# Altium PCB PCB_32u4最小系统-copy_2025-07-01.pcbdoc
Units mil, origin at the board's own origin, x right, y up, seen from the top; angles counter-clockwise.
Board outline 4150.55 x 3100 mil, 2 copper layers (Top Layer, Bottom Layer); 33 components, 40 nets, 158 pads, 52 vias.
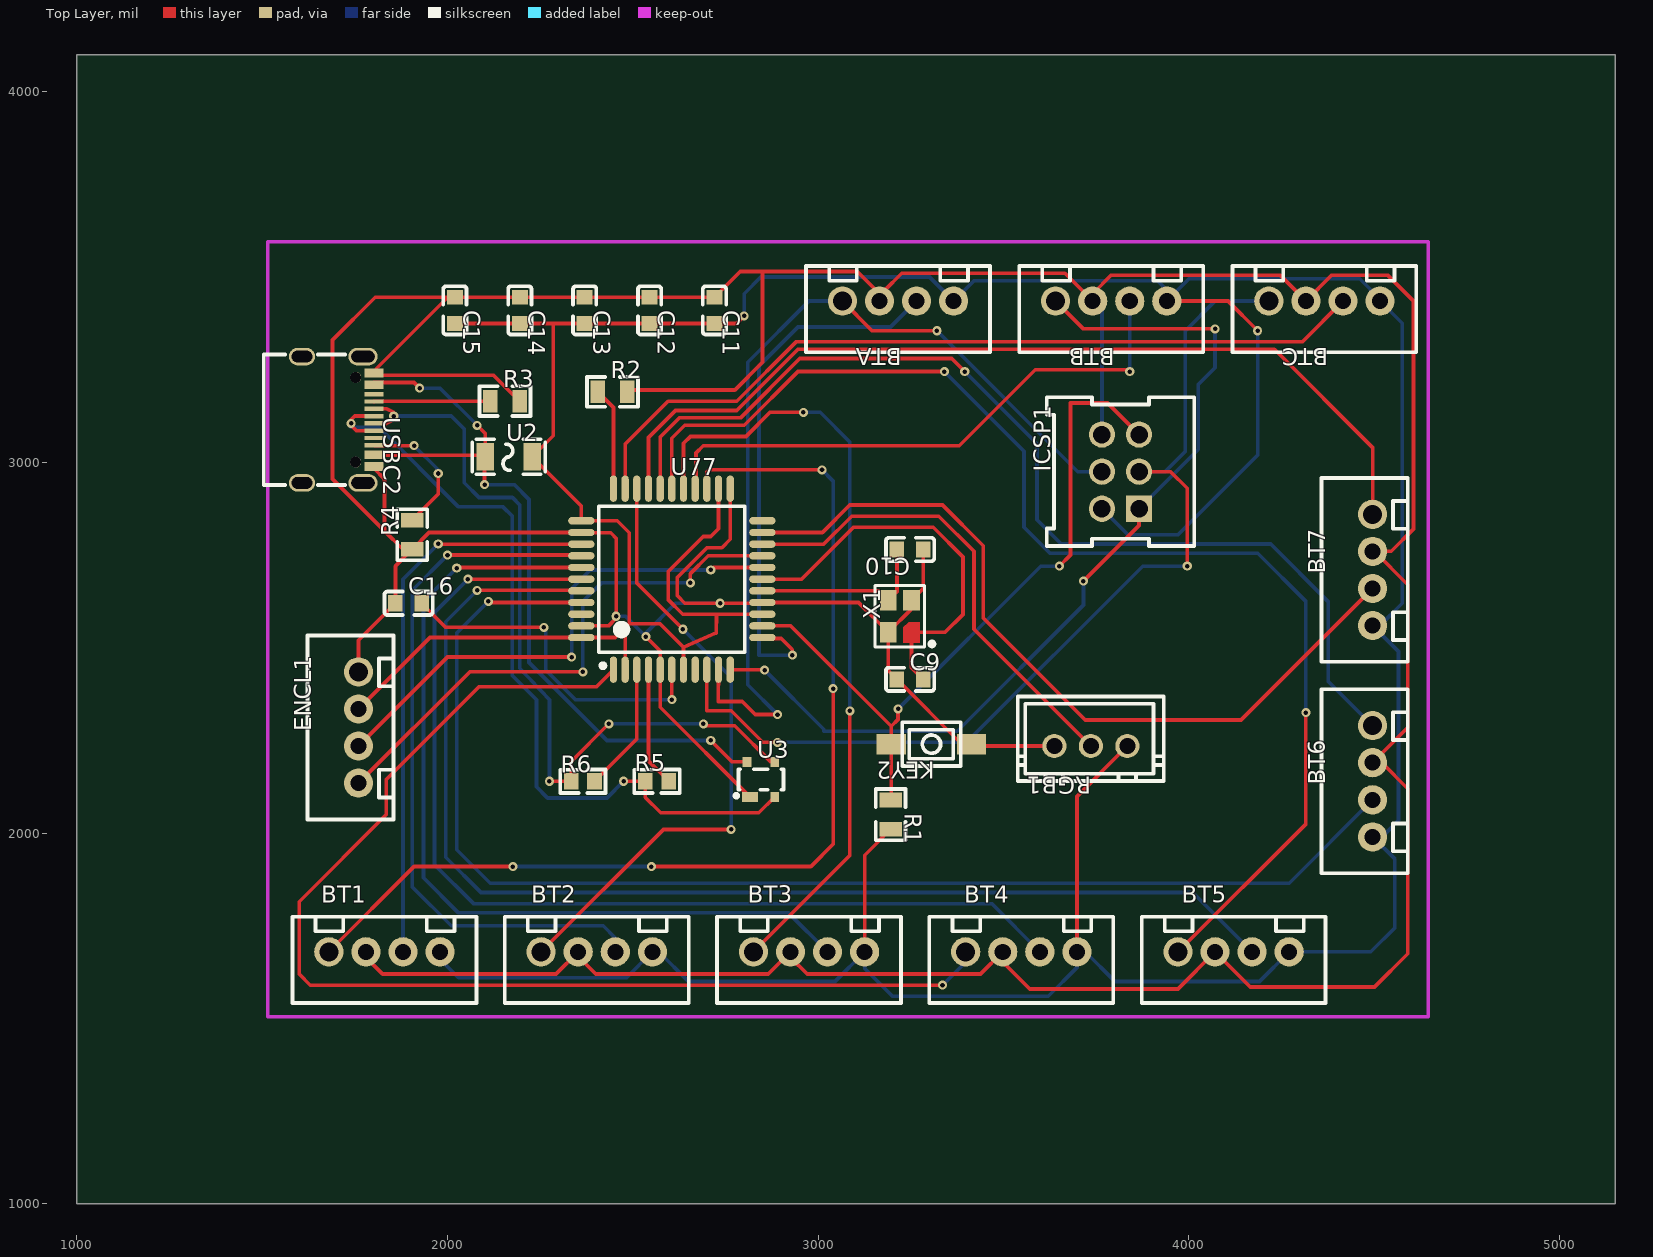
[diagram p0: Top Layer view]
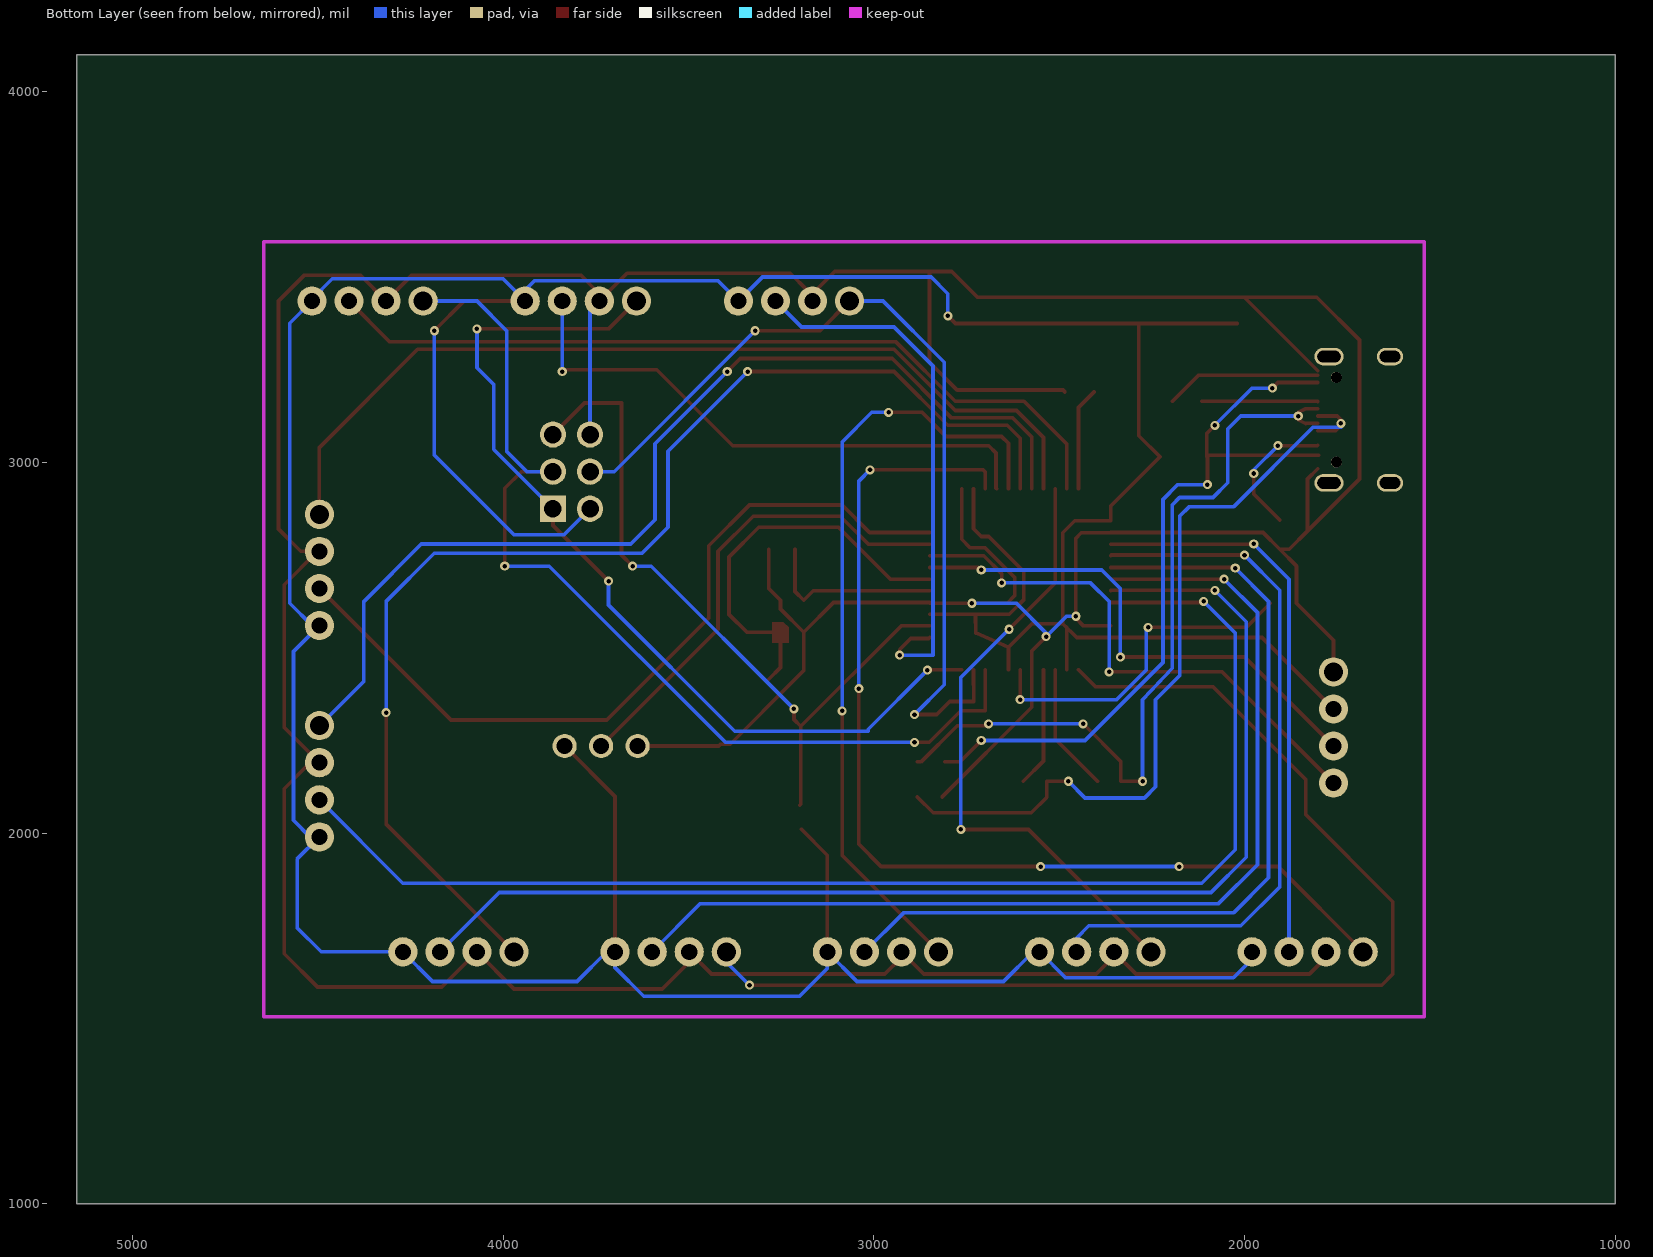
[diagram p1: Bottom Layer view, seen from below]

## Layer stack, top to bottom
Top Layer: signal copper (thickness not stored)
Dielectric: dielectric 12.6, FR-4, Dk 4.8
Bottom Layer: signal copper (thickness not stored)

## Board outline
5150.55,1000 1000,1000 1000,4100 5150.55,4100

## Components (designator, comment, footprint, x,y, rotation, side; value= is the part's Value field where it differs from the comment)
BT1 "XH2.54-4" CONN-TH_XH2.54-4 1830.55,1680 r180 top
BT2 "XH2.54-4" CONN-TH_XH2.54-4 2403.05,1680 r180 top
BT3 "XH2.54-4" CONN-TH_XH2.54-4 2975.55,1680 r180 top
BT4 "XH2.54-4" CONN-TH_XH2.54-4 3548.05,1680 r180 top
BT5 "XH2.54-4" CONN-TH_XH2.54-4 4120.55,1680 r180 top
BT6 "XH2.54-4" CONN-TH_XH2.54-4 4495.55,2140 r90 top
BT7 "XH2.54-4" CONN-TH_XH2.54-4 4495.55,2710 r90 top
BTA "XH2.54-4" CONN-TH_XH2.54-4 3215.55,3435 r180 top
BTB "XH2.54-4" CONN-TH_XH2.54-4 3790.55,3435 r180 top
BTC "XH2.54-4" CONN-TH_XH2.54-4 4365.55,3435 r180 top
C9 "22pF" C0603 3248.1,2415 r0 top
C10 "22pF" C0603 3248.1,2765 r180 top
C11 "100nF" C0603 2720.55,3410 r270 top
C12 "100nF" C0603 2545.55,3410 r270 top
C13 "100nF" C0603 2370.55,3410 r270 top
C14 "100nF" C0603 2195.55,3410 r270 top
C15 "470nF" C0603 2020.55,3410 r270 top
C16 "1uF" C0603 1895.55,2620 r0 top
ENCL1 "XH2.54-4" CONN-TH_XH2.54-4 1760.55,2285 r90 top
ICSP1 "XH2_54-2X3P直插" CONN-TH_XH2.54-2X3P 3815.55,2975 r90 top
KEY2 "Switch3x4x2" KEY-3.0*4.0 3305.55,2240 r180 top
R1 "10K" R0805 3195.55,2050 r270 top
R2 "1K" R0805 2445.55,3190 r0 top
R3 "5.1K" R0805 2155.55,3165 r0 top
R4 "5.1K" R0805 1905.55,2805 r90 top
R5 "22" R0603 2565.55,2140 r180 top
R6 "22" R0603 2365.55,2140 r180 top
RGB1 "XH2.54-3P 直插" CONN-TH_XH2.54-3P 3735.55,2235 r180 top
U2 "MF-NSMF050-2" F1206 2165.55,3015 r0 top
U3 "PRTR5V0U2X" SOT-143_L2.9-W1.3-P1.92-LS2.3-BL 2845.55,2145 r0 top
U77 "ATMEGA32U4-AU" QFP-44_L10.0-W10.0-P0.80-LS13.2-BL 2605.55,2685 r0 top
USBC2 "TYPE-C-31-M-12" USB-C_SMD-TYPE-C-31-M-12 1705.55,3115 r270 top
X1 "16MHz" OSC-SMD_4P-L3.2-W2.5-BL 3220.55,2585 r90 top

## Footprints (in the part's own frame and the unit in brackets; to place one, negate y for a bottom-side part, rotate by r counter-clockwise, add the part's x,y. Pads: shape width x height; smd on the part's side, far side on the other; paste and mask are expansions set on the pad)
C0603 [mm]
  rect 1x1.1 smd paste+0 mask+0.102: 1(-0.9,0) 2(0.9,0)
  silkscreen extent -1.65,-0.8 1.65,0.8
CONN-TH_XH2.54-2X3P [mm]
  rect 1.8x1.8 hole 1.2 paste+0 mask+0.05: 1(-2.54,-1.27)
  round 1.8 hole 1.2 paste+0 mask+0.05: 2(0,-1.27) 3(2.54,-1.27) 4(2.54,1.27) 5(0,1.27) 6(-2.54,1.27)
  silkscreen extent -5.1,-5.05 5.1,5.05
CONN-TH_XH2.54-3P [mm]
  round 1.65 hole 1.1 paste+0 mask+0.05: 1(-2.5,0) 2(0,0) 3(2.5,0)
  silkscreen extent -5,-3.4 5,2.4
CONN-TH_XH2.54-4 [mm]
  round 2 hole 1.1 paste+0 mask+0.051: 1(-3.81,0) 2(-1.27,0) 3(1.27,0)
  round 2 hole 1.3 paste+0 mask+0.051: 4(3.81,0)
  silkscreen extent -6.3,-2.4 6.3,3.5
F1206 [mm]
  rect 1.2x1.9 smd paste+0 mask+0.102: 1(-1.6,0) 2(1.6,0)
  silkscreen extent -2.5,-1.2 2.5,1.2
KEY-3.0*4.0 [mm]
  rect 2x1.4 smd paste+0 mask+0.051: 1(-2.752,0.001) 2(2.752,-0.001)
  silkscreen extent -2.01,-1.5 1.99,1.5
OSC-SMD_4P-L3.2-W2.5-BL [mm]
  rect 1.4x1.15 smd paste+0 mask+0.102: 2(1.1,-0.8) 3(1.1,0.8) 4(-1.1,0.8)
  Top Layer region: -1.8,-0.225 -0.762,-0.225 -0.4,-0.604 -0.4,-1.375 -1.8,-1.375
  silkscreen extent -2.1,-2.35 2.1,1.7
QFP-44_L10.0-W10.0-P0.80-LS13.2-BL [mm]
  oval 0.5x1.8 smd paste+0 mask+0.102: 1(-4,-6.2) 2(-3.2,-6.2) 3(-2.4,-6.2) 4(-1.6,-6.2) 5(-0.8,-6.2) 6(0,-6.2) 7(0.8,-6.2) 8(1.6,-6.2) 9(2.4,-6.2) 10(3.2,-6.2) 11(4,-6.2) 23(4,6.2) 24(3.2,6.2) 25(2.4,6.2) 26(1.6,6.2) 27(0.8,6.2) 28(0,6.2) 29(-0.8,6.2) 30(-1.6,6.2) 31(-2.4,6.2) 32(-3.2,6.2) 33(-4,6.2)
  oval 1.8x0.5 smd paste+0 mask+0.102: 12(6.2,-4) 13(6.2,-3.2) 14(6.2,-2.4) 15(6.2,-1.6) 16(6.2,-0.8) 17(6.2,0) 18(6.2,0.8) 19(6.2,1.6) 20(6.2,2.4) 21(6.2,3.2) 22(6.2,4) 34(-6.2,4) 35(-6.2,3.2) 36(-6.2,2.4) 37(-6.2,1.6) 38(-6.2,0.8) 39(-6.2,0) 40(-6.2,-0.8) 41(-6.2,-1.6) 42(-6.2,-2.4) 43(-6.2,-3.2) 44(-6.2,-4)
  silkscreen extent -5,-6.08 5,5
R0603 [mm]
  rect 1x1.1 smd paste+0 mask+0.102: 1(-0.8,0) 2(0.8,0)
  silkscreen extent -1.55,-0.8 1.55,0.81
R0805 [mm]
  rect 1x1.55 smd paste+0 mask+0.102: 1(-1,0) 2(1,0)
  silkscreen extent -1.75,-1.02 1.75,1.02
SOT-143_L2.9-W1.3-P1.92-LS2.3-BL [mm]
  rect 1.1x0.7 smd paste+0 mask+0.05: 1(-0.75,-1.2)
  rect 0.6x0.7 smd paste+0 mask+0.05: 2(0.95,-1.2) 3(0.95,1.2) 4(-0.95,1.2)
  silkscreen extent -1.8,-1.24 1.55,0.7
USB-C_SMD-TYPE-C-31-M-12 [mm]
  oval 1.2x2 hole 0.8 slot 1.6 at 90 deg paste+0 mask+0.051: 0(-4.325,1.706) 1(4.325,1.706)
  oval 1.2x1.8 hole 0.8 slot 1.4 at 90 deg paste+0 mask+0.051: 2(4.325,-2.474) 3(-4.325,-2.474)
  rect 0.3x1.3 smd paste-100 mask+0.051: A1(-3.35,2.474) A4(-2.55,2.474) A5(-1.25,2.474) A6(-0.25,2.474) A7(0.25,2.474) A8(1.25,2.474) A9(2.55,2.474) A12(3.35,2.474) B1(3.05,2.474) B4(2.25,2.474) B5(1.75,2.474) B6(0.75,2.474) B7(-0.75,2.474) B8(-1.75,2.474) B9(-2.25,2.474) B12(-3.05,2.474)
  round 0.75 hole 0.75 unplated paste+0: ""(-2.9,1.206) ""(2.9,1.206)
  silkscreen extent -4.47,-5.09 4.47,0.49

## Via types
v1: diameter 24.41, hole 12.2, Top Layer to Bottom Layer, tented both sides, 52 vias

## Nets (pads, with @x,y where several pads share a name; then routed paths per layer and width w, separated by ;. In a path a pad name is that pad's centre, name@x,y a point inside that pad or via, vN(x,y) a via of type N, cw(c..) or ccw(c..) an arc to the next point about the centre after c; other vN are vias at no path point)
+5V: BT1.1 BT2.1 BT3.1 BT4.1 BT5.1 BT6.1 BT7.1 BTA.1 BTB.1 BTC.1 C11.2 C12.2 C13.2 C14.2 C15.2 ENCL1.3 ICSP1.6 R1.2 RGB1.1 U2.2 U77.2 U77.7 U77.14 U77.24 U77.34 U77.44 | length 12714.3
  Top Layer w10: ENCL1.3 1953.07,2527.52 U77.44 2453.05,2527.5 2490.55,2565 ; C15.2 C14.2 C13.2 C12.2 C11.2 2780.11,3374.56 v1(2800.55,3395) ; C13.2 2285.55,3374.6 2285.55,3072 2228.55,3015 2361.46,2882.09 U77.34 2458.05,2842.5 2490.55,2810 2490.55,2565 ; U77.2 2479.57,2554.02 2490.55,2565 ; U77.7 2637.05,2501.5 ; U77.24@2731.55,2929.1 2731.55,2821 2710.55,2800 2690.55,2800 2595.55,2705 2595.55,2630 2635.05,2590.5 2726.05,2590.5 ; U77.14@2849.65,2590.5 2726.05,2590.5 ; BT3.1 3125.55,1940.63 R1.2 ; BT4.1 3698.05,2099.07 RGB1.1 ; BTB.1 4105.55,3435 v1(4185.55,3355) ; 2490.55,2565 2573.55,2565 2637.05,2501.5 ; 2637.05,2501.5 2725.55,2540 2726.05,2590.5
  Bottom Layer w10: BT1.1 1980.55,1660 2030.55,1610 2483.05,1610 BT2.1 2570.55,1680 2650.55,1600 3045.55,1600 BT3.1 3125.55,1635 3200.55,1560 3620.55,1560 3698.05,1637.5 BT4.1 3720.55,1680 3800.55,1600 4190.55,1600 BT5.1 4490.55,1680 4555.55,1745 4555.55,1930 BT6.1 4520.55,1990 4565.55,2035 4565.55,2490 BT7.1 4515.55,2560 4575.55,2620 4575.55,3375 BTC.1 4515.55,3440 4460.55,3495 4000.55,3495 BTB.1 3940.55,3465 3915.55,3490 3420.55,3490 BTA.1 3300.55,3500 2845.55,3500 2800.55,3455 v1(2800.55,3395) ; ICSP1.6 3835.55,2805 3970.55,2805 4185.55,3020 v1(4185.55,3355)
A0: BT1.2 U77.36 | length 1525.5
  Top Layer w10: v1(1975.55,2780) 1976.06,2779.49 U77.36
  Bottom Layer w10: BT1.2 1880.55,2685 v1(1975.55,2780)
A1: BT2.2 U77.37 | length 1938
  Top Layer w10: v1(2000.55,2750) 2359.45,2750 U77.37
  Bottom Layer w10: v1(2000.55,2750) 1905.55,2655 1905.55,1855 2010.55,1750 2420.55,1750 2453.05,1717.5 BT2.2
A2: BT3.2 U77.38 | length 2381.7
  Top Layer w10: v1(2025.55,2715) 2027.05,2716.5 U77.38
  Bottom Layer w10: v1(2025.55,2715) 1935.55,2625 1935.55,1880 2030.55,1785 2920.55,1785 BT3.2
A3: BT4.2 U77.39 | length 2843
  Top Layer w10: v1(2055.55,2685) U77.39
  Bottom Layer w10: v1(2055.55,2685) 1965.55,2595 1965.55,1915 2070.55,1810 3468.05,1810 BT4.2
A4: BT5.2 U77.40 | length 3318.2
  Top Layer w10: v1(2080.55,2655) 2361.46,2655 U77.40
  Bottom Layer w10: v1(2080.55,2655) 1995.55,2570 1995.55,1935 2090.55,1840 4010.55,1840 BT5.2
A5: BT6.2 U77.41 | length 3557.8
  Top Layer w10: v1(2110.55,2625) 2113.54,2622.01 U77.41
  Bottom Layer w10: v1(2110.55,2625) 2025.55,2540 2025.55,1955 2115.55,1865 4270.55,1865 BT6.2
C16_2: C16.2 U77.6 | length 930.5
  Top Layer w10: C16.2 1995.99,2555 v1(2260.55,2555) ; v1(2605.55,2360) U77.6
  Bottom Layer w10: v1(2260.55,2555) 2265.55,2555 2265.55,2440 2345.55,2360 v1(2605.55,2360)
D0/RX: RGB1.2 U77.20 | length 1297
  Top Layer w10: U77.20@2849.65,2779.5 3015.05,2779.5 3090.55,2855 3325.55,2855 3420.55,2760 3420.55,2550 RGB1.2
D1/TX: BT7.2 U77.21 | length 2178.1
  Top Layer w10: U77.21@2849.65,2811 3011.55,2811 3085.55,2885 3335.55,2885 3445.55,2775 3445.55,2580 3720.55,2305 4140.55,2305 BT7.2
D2/SDA: ENCL1.1 U77.19 | length 1469
  Top Layer w10: ENCL1.1 2060.55,2435 v1(2365.55,2435) ; v1(2655.55,2675) 2655.55,2700 2703.55,2748 U77.19@2849.66,2748
  Bottom Layer w10: v1(2365.55,2435) 2365.55,2625 2415.55,2675 v1(2655.55,2675)
D3/SCL: ENCL1.2 U77.18 | length 1396.9
  Top Layer w10: ENCL1.2 2000.55,2475 v1(2335.55,2475) ; v1(2710.55,2710) 2717.05,2716.5 U77.18
  Bottom Layer w10: v1(2335.55,2475) 2335.55,2660 2385.55,2710 v1(2710.55,2710)
D4: BT1.4 U77.25 | length 2860.7
  Top Layer w10: BT1.4 1910.55,1910 v1(2176.68,1910) ; v1(2550.55,1910) 2980.55,1910 3040.55,1970 v1(3040.55,2389.86) ; U77.25@2700.05,2929.1 2700.05,2974.5 2705.55,2980 v1(3010.55,2980)
  Bottom Layer w10: v1(2176.68,1910) v1(2550.55,1910) ; v1(3010.55,2980) 3040.55,2950 v1(3040.55,2389.86)
D5*: BT2.4 U77.31 | length 1673.7
  Top Layer w10: BT2.4 2583.05,2010 v1(2765.55,2010) ; U77.31 2511.06,2674.49 v1(2635.55,2550)
  Bottom Layer w10: v1(2635.55,2550) 2765.55,2420 v1(2765.55,2010)
D6*: BT3.4 U77.27 | length 2121.3
  Top Layer w10: U77.27 2637.05,3051.5 2655.55,3070 2805.55,3070 2870.55,3135 v1(2960.55,3135) ; BT3.4 3085.55,1940 v1(3085.55,2330)
  Bottom Layer w10: v1(2960.55,3135) 3005.55,3135 3085.55,3055 v1(3085.55,2330)
D7: BT4.4 U77.1 | length 3220.7
  Top Layer w10: U77.1 2402.16,2395 2085.55,2395 1835.55,2145 1835.55,2050 1600.55,1815 1600.55,1620 1630.55,1590 v1(3335.55,1590)
  Bottom Layer w10: v1(3335.55,1590) 3398.05,1652.5 BT4.4
D+: R5.1 U77.4 | length 323.5
  Top Layer w10: U77.4 2542.56,2194.48 R5.1
D-: R6.1 U77.3 | length 348.1
  Top Layer w10: R6.1 2511.06,2254.02 U77.3
GND: BT1.3 BT2.3 BT3.3 BT4.3 BT5.3 BT6.3 BT7.3 BTA.3 BTB.3 BTC.3 C9.1 C10.1 C11.1 C12.1 C13.1 C14.1 C15.1 C16.1 ENCL1.4 ICSP1.4 KEY2.1 R2.2 R3.2 R4.1 RGB1.3 U3.1 U77.5 U77.15 U77.23 U77.35 U77.43 USBC2.A1 USBC2.A12 USBC2.B1 USBC2.B12 X1.2 X1.4 | length 14972.8
  Top Layer w10: ENCL1.4 1760.55,2520.43 C16.1 1860.12,2720.2 R4.1 ; BT1.3 1780.55,1665 1825.55,1620 2293.05,1620 BT2.3 2353.05,1667.5 2400.55,1620 2865.55,1620 BT3.3 2925.55,1665 2970.55,1620 3438.05,1620 BT4.3 3498.05,1652.5 3570.55,1580 3970.55,1580 BT5.3 4165.55,1585 4500.55,1585 4590.55,1675 4590.55,2120 4520.55,2190 BT6.3 4590.55,2285 4590.55,2670 4500.55,2760 BT7.3 4545.55,2760 4605.55,2820 4605.55,3435 4535.55,3505 4385.55,3505 BTC.3 4245.55,3505 3790.55,3505 3740.55,3455 BTB.3 3665.55,3510 3225.55,3510 BTA.3@3179.15,3463.6 ; USBC2.A12 1830.55,2955.52 1830.55,2815 ; USBC2.B12 2124.84,3235.08 R3.2 ; USBC2.A1 2001.51,3445.43 C15.1 ; U77.43 2434.55,2559 2455.55,2580 v1(2455.55,2585) 2455.55,2795 2440.55,2810 U77.35 1950.9,2810.98 R4.1 ; R2.2@2484.95,3190 2489.95,3195 2775.55,3195 2849.95,3270 2849.95,3515 ; v1(2535.55,2530) 2574.05,2491.5 U77.5 2574.05,2339.73 U3.1 ; U77.23@2763.05,2929.1 2763.05,2792.5 2740.55,2770 2700.55,2770 2620.55,2690 2620.55,2640 2640.55,2620 v1(2735.55,2620) 2849.65,2620 2849.65,2622 3108.73,2622.01 X1.4 ; BTA.3 3165.55,3455 3105.55,3515 2790.12,3515 C11.1 C12.1 C13.1 C14.1 C15.1 ; C10.1 3283.53,2659.79 X1.2 3252.05,2604.69 X1.4 ; RGB1.3 3418.85,2235 KEY2.1 3387.71,2239.96 C9.1 3189.05,2438.62 X1.4 ; 1830.55,2815 1879.92,2765.63 R4.1 ; 1830.55,2815 1690.55,2955 1690.55,3330 1805.98,3445.43 C15.1
  Bottom Layer w10: v1(2455.55,2585) 2480.55,2585 v1(2535.55,2530) 2535.55,2540 2615.55,2620 v1(2735.55,2620) ; BTB.3 3765.55,3410 ICSP1.4
IO8: BT5.4 U77.28 | length 3385.3
  Top Layer w10: U77.28 2605.55,3065 2640.55,3100 2800.55,3100 2945.55,3245 v1(3340.55,3245) ; BT5.4 4315.55,2025 v1(4315.55,2325)
  Bottom Layer w10: v1(3340.55,3245) 3555.55,3030 3555.55,2825 3625.55,2755 4185.55,2755 4315.55,2625 v1(4315.55,2325)
IO9*: BT6.4 U77.29 | length 2804.6
  Top Layer w10: U77.29 2574.05,3068.5 2625.55,3120 2790.55,3120 2950.55,3280 3360.55,3280 v1(3395.55,3245)
  Bottom Layer w10: v1(3395.55,3245) 3590.55,3050 3590.55,2845 3655.55,2780 4220.55,2780 4375.55,2625 4375.55,2410 BT6.4
IO10*: BT7.4 U77.30 | length 2479.2
  Top Layer w10: U77.30 2542.55,3067 2615.55,3140 2780.55,3140 2945.55,3305 4230.55,3305 4495.55,3040 BT7.4
IO11*: BTA.2 U77.12 | length 1476.9
  Top Layer w10: U77.12 2852.16,2525 2900.55,2525 2930.55,2495 v1(2930.55,2480)
  Bottom Layer w10: v1(2930.55,2480) 2840.55,2480 2840.55,2545 2840.55,3260 2945.55,3365 3195.55,3365 BTA.2
IO12: BTB.2 U77.26 | length 1549.9
  Top Layer w10: U77.26@2668.55,2929.1 2670.55,2931.1 2670.55,3025 2690.55,3045 3380.55,3045 3585.55,3250 v1@3840.55,3250
  Bottom Layer w10: v1(3840.55,3245) BTB.2
IO13*: BTC.2 U77.32 | length 2215.8
  Top Layer w10: U77.32 2479.55,3049 2595.55,3165 2780.55,3165 2940.55,3325 4305.55,3325 BTC.2
MISO: BTB.4 ICSP1.1 U77.11 | length 2517.7
  Top Layer w10: U77.11@2763.05,2440.9 v1(2855.55,2440) ; BTB.4 3715.55,3360 v1(4070.55,3360) ; v1(3715.55,2680) 3865.55,2830 ICSP1.1
  Bottom Layer w10: v1(2855.55,2440) 3015.55,2280 3015.55,2275 3375.55,2275 3715.55,2615 v1(3715.55,2680) ; ICSP1.1 4025.55,3035 4025.55,3210 4070.55,3255 v1(4070.55,3360)
MOSI: BTA.4 ICSP1.5 U77.10 | length 2457.4
  Top Layer w10: U77.10@2731.55,2440.9 2730.55,2355 2795.55,2355 2830.55,2320 v1(2890.55,2320) ; BTA.4 3145.55,3355 v1(3320.55,3355)
  Bottom Layer w10: v1(2890.55,2320) 2810.55,2400 2810.55,3270 2975.55,3435 BTA.4 ; v1(3320.55,3355) 3700.55,2975 ICSP1.5
R2_1: R2.1 U77.33 | length 278.3
  Top Layer w10: R2.1 2448.07,3148.11 U77.33
RESET: ICSP1.3 KEY2.2 R1.1 U77.13 | length 1995.5
  Top Layer w10: U77.13 2926.53,2559.02 3197.22,2288.33 ; R1.1@3199.92,2075 3197.22,2077.7 KEY2.2 3197.22,2288.33 ; v1(3215.55,2335) 3215.55,2306.66 3197.22,2288.33 ; v1(3650.55,2720) 3680.55,2750 3680.55,3160 3780.55,3160 ICSP1.3
  Bottom Layer w10: v1(3215.55,2335) 3600.55,2720 v1(3650.55,2720)
RXLED: U77.8
SCK: BTC.4 ICSP1.2 U77.9 | length 2727.9
  Top Layer w10: U77.9@2700.05,2440.9 2700.05,2330 2765.55,2330 2850.55,2245 v1(2890.55,2245) ; ICSP1.2 3950.55,2975 3995.55,2930 v1(3995.55,2720)
  Bottom Layer w10: v1(2890.55,2245) 3400.55,2245 3875.55,2720 v1(3995.55,2720) ; ICSP1.2 3935.55,2975 3990.55,3030 3990.55,3355 4070.55,3435 BTC.4
TXLED: U77.22
USBC2_0: USBC2.0
USBC2_A5: R3.1 USBC2.A5 | length 313.2
  Top Layer w10: USBC2.A5 R3.1
USBC2_B5: R4.2 USBC2.B5 | length 364.6
  Top Layer w10: USBC2.B5 1804.06,3045 v1(1910.55,3045) ; R4.2 1975.55,2914.37 v1(1975.55,2970)
  Bottom Layer w10: v1(1910.55,3045) 1975.55,2980 v1(1975.55,2970)
USBC2_B6: R5.2 U3.2 USBC2.A6 USBC2.B6 | length 2203.1
  Top Layer w10: USBC2.B6 1755.05,3085.5 1740.55,3100 1740.55,3115 1750.35,3124.8 USBC2.A6 ; v1(2475.55,2140) R5.2 2534.05,2096.5 2575.55,2055 2840.19,2055 U3.2
  Bottom Layer w10: v1(1740.55,3105) 1740.55,3095 1815.55,3095 2030.55,2880 2150.55,2880 2175.55,2855 2175.55,2424.8 2240.55,2359.8 2240.55,2125 2270.55,2095 2430.55,2095 v1(2475.55,2140)
USBC2_B7: R6.2 U3.3 USBC2.A7 USBC2.B7 | length 2179.2
  Top Layer w10: USBC2.A7 1835.55,3105 1855.55,3115 1855.55,3135 1836.02,3144.53 USBC2.B7 ; v1(2275.55,2140) R6.2 2334.05,2193.5 v1(2435.55,2295) ; v1(2690.55,2295) 2690.55,2290 2775.55,2290 2873.31,2192.24 U3.3
  Bottom Layer w10: v1(1855.55,3125) 2010.45,3125 2045.55,3089.9 2045.55,2945 2085.55,2905 2175.55,2905 2195.55,2885 2195.55,2445 2275.55,2360 v1(2275.55,2140) ; v1(2435.55,2295) v1(2690.55,2295)
VCC: U2.1 U3.4 USBC2.A4 USBC2.A9 USBC2.B4 USBC2.B9 | length 2070
  Top Layer w10: USBC2.A9@1800.95,3019.6 U2.1@2100.55,3020 ; USBC2.A4 1910.16,3215.39 v1(1925.55,3200) ; v1(2080.55,3100) 2102.56,3077.99 U2.1 2100.55,3012.99 v1(2100.55,2940) ; v1(2710.55,2250) 2768.31,2192.24 U3.4
  Bottom Layer w10: v1(1925.55,3200) 1980.55,3200 v1(2080.55,3100) ; v1(2100.55,2940) 2180.55,2940 2220.55,2900 2220.55,2460 2430.55,2250 v1(2710.55,2250)
X1_1: C9.2 U77.17 | length 1085.3
  Top Layer w10: U77.17@2849.65,2685 2955.55,2685 3095.55,2825 3310.55,2825 3390.55,2745 3390.55,2590 3342.25,2541.7 3252.05,2541.7 3252.05,2446.49 C9.2
X1_3: C10.2 U77.16 X1.3 | length 496.3
  Top Layer w10: U77.16 3163.86,2653.5 X1.3 3212.66,2651.92 C10.2
pads on no net: U77.42 USBC2. USBC2.1 USBC2.2 USBC2.3 USBC2.A8 USBC2.B8